# Altium PCB ScaledModelBoard.PcbDoc
Units mm, origin at the board's own origin, x right, y up, seen from the top; angles counter-clockwise.
Board outline 100 x 100 mm, 2 copper layers (Top Layer, Bottom Layer); 23 components, 27 nets, 101 pads, 7 vias.
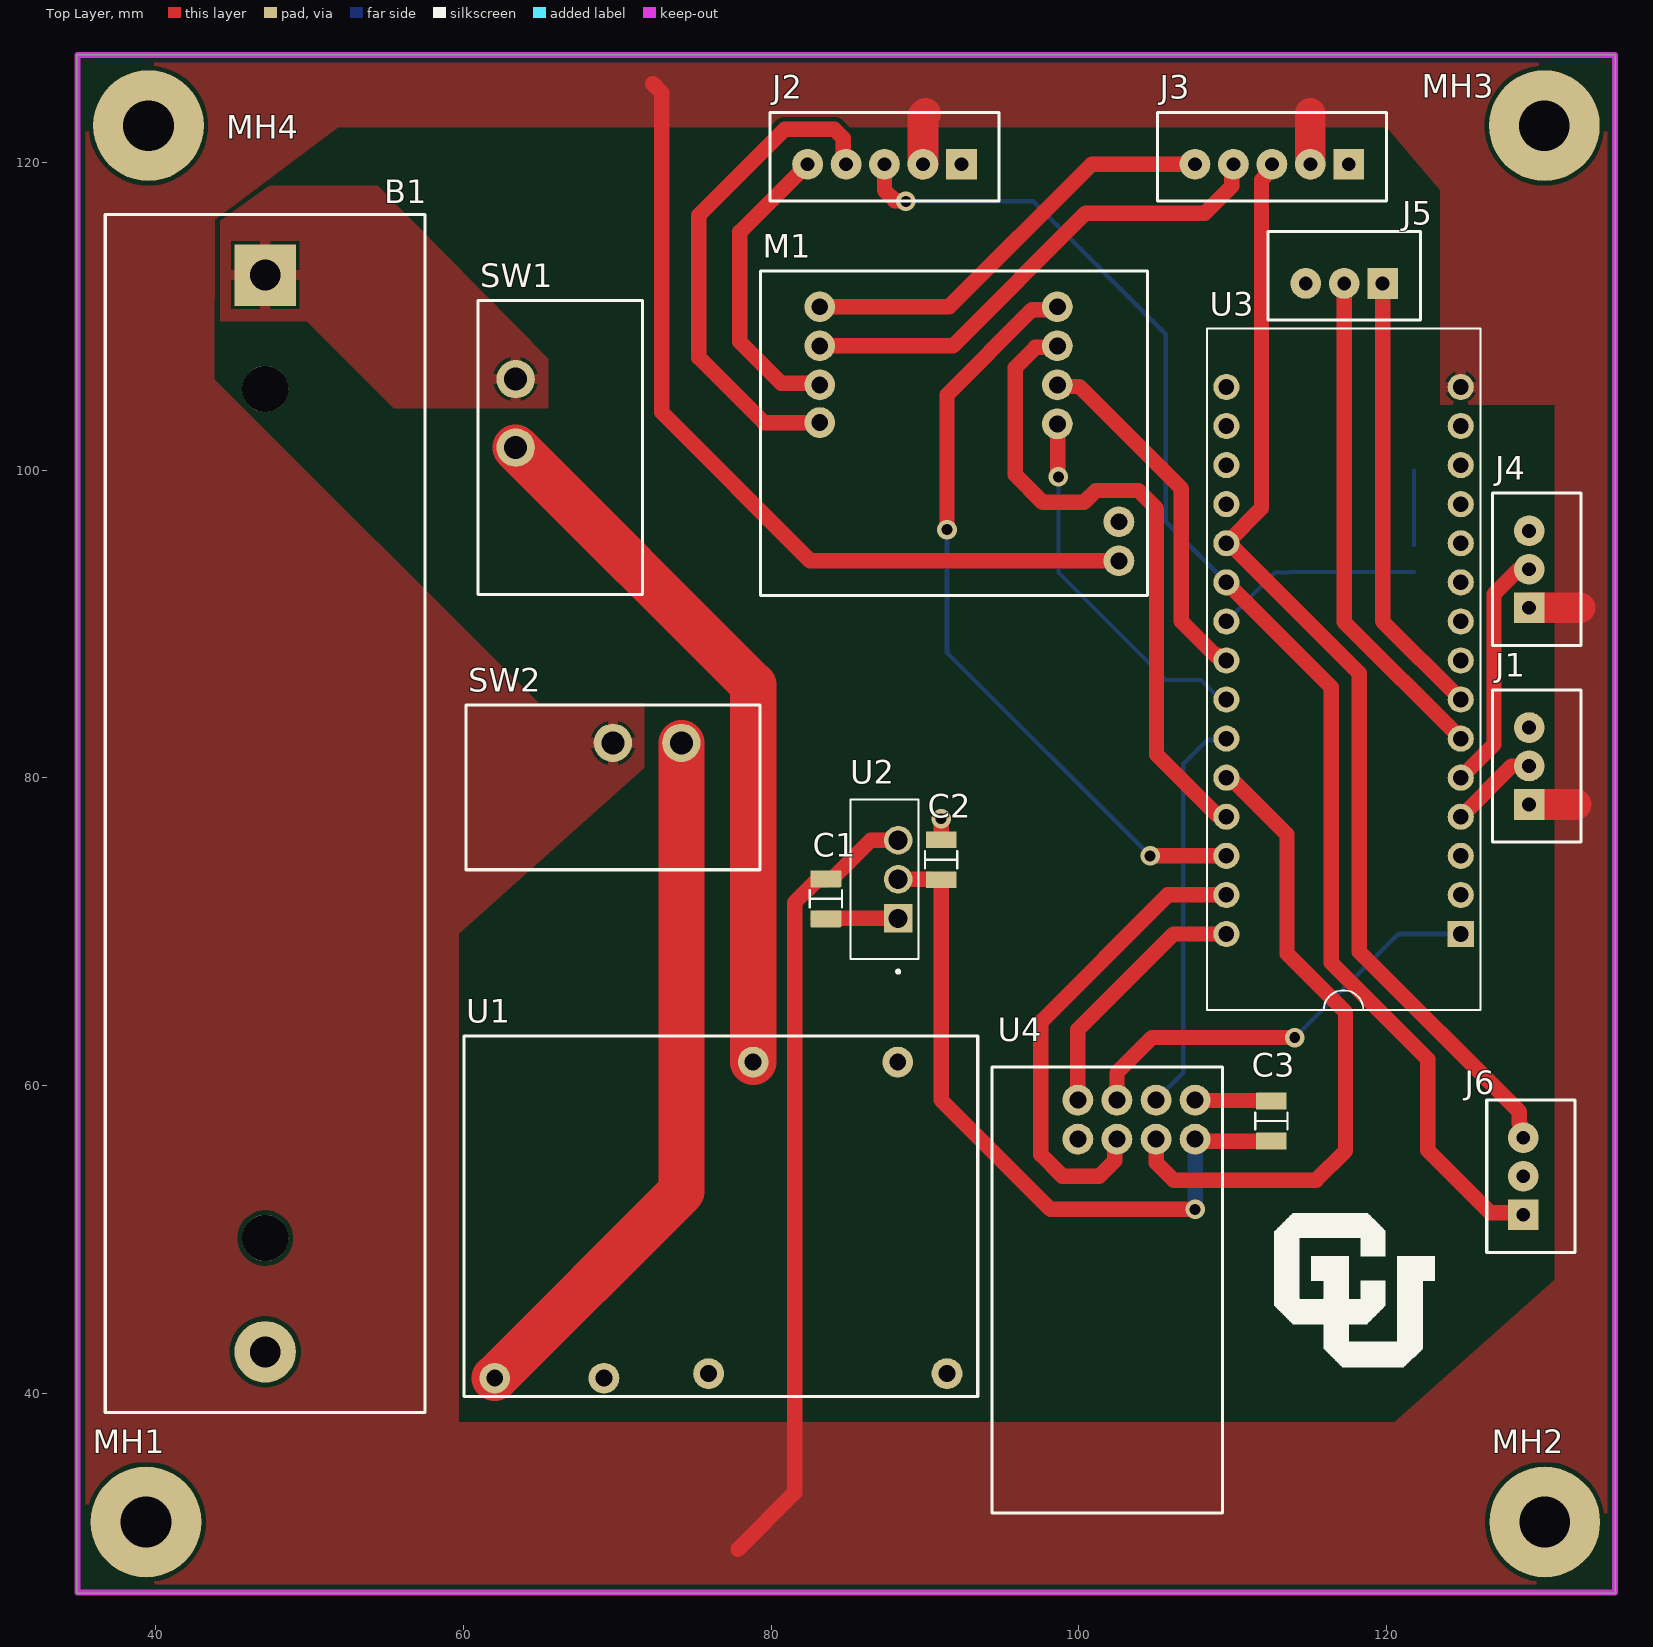
[diagram p0: Top Layer view]
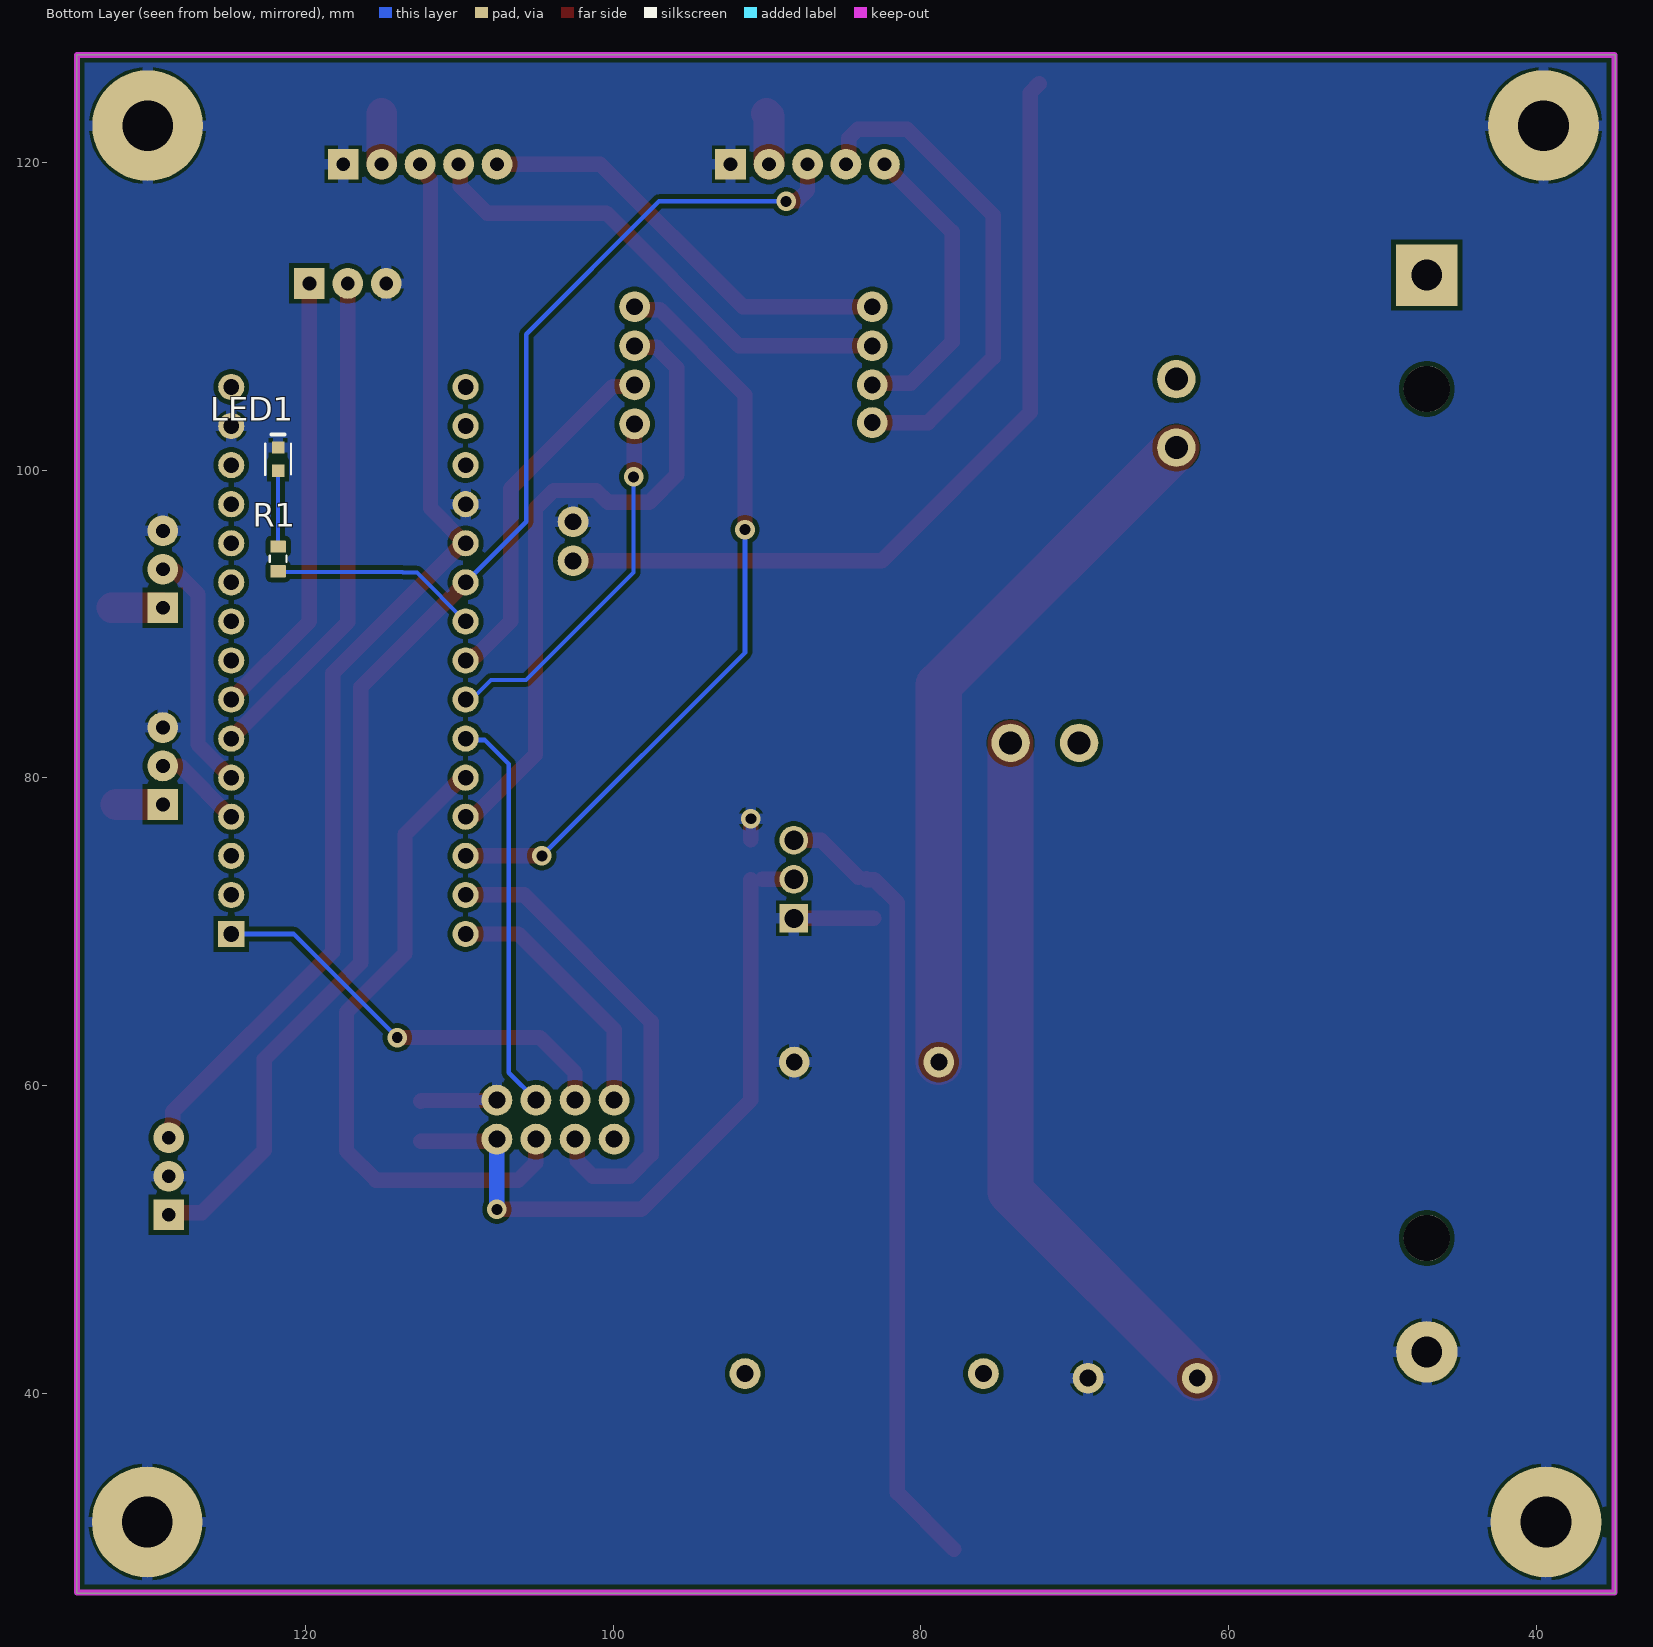
[diagram p1: Bottom Layer view, seen from below]
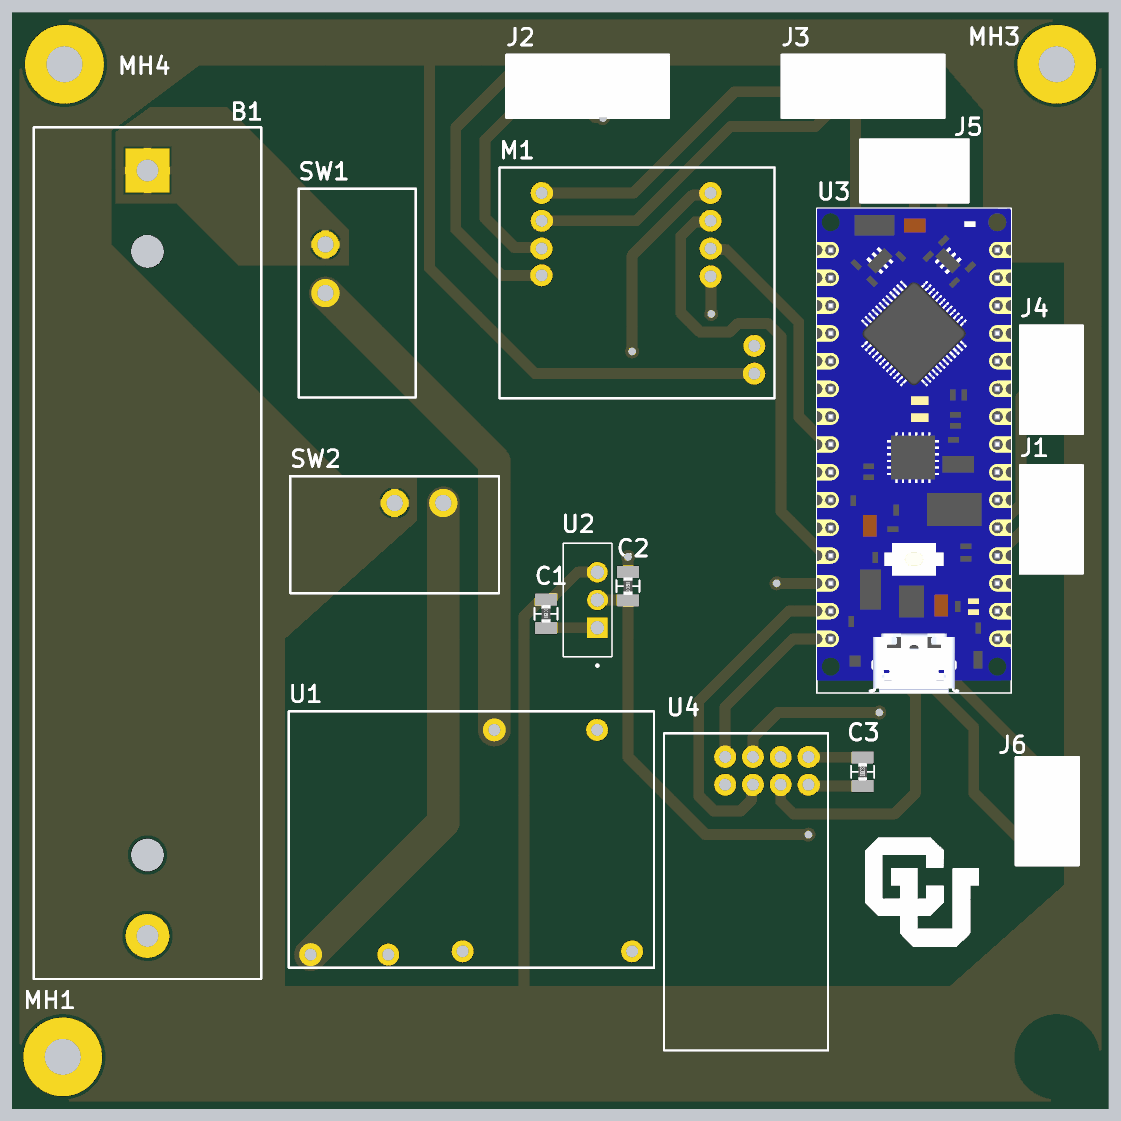
[diagram p2: 3D render of the assembled board from above, using the file's embedded part models]

## Layer stack, top to bottom
Top Solder: solder mask 0.0102, Solder Resist, Dk 3.5
Top Layer: signal copper 0.0356
Dielectric 1: dielectric 0.32, FR-4, Dk 4.8
Bottom Layer: signal copper 0.0356
Bottom Solder: solder mask 0.0102, Solder Resist, Dk 3.5

## Board outline
34.874,27 34.874,127 134.874,127 134.874,27

## Design rules (kind name [scope] priority, off if disabled: settings)
Clearance [All] p1: gap=0.3 ignorepadtopadclearanceinfootprint=FALSE
HoleSize [All] p1: absolutevalues=TRUE maxlimit=5 minlimit=0.025 maxpercent=80.000 minpercent=20.000
MinimumSolderMaskSliver [All] p1: minsoldermaskwidth=0.1
PolygonConnect [All] p1: connectstyle=Relief reliefconductorwidth=0.7 reliefentries=4 polygonreliefangle="90 Angle" airgapwidth=0.2
RoutingVias [All] p1: holewidth=0.711 width=1.27 viastyle="Through Hole" minholewidth=0.711 minwidth=1.27 maxholewidth=0.711 maxwidth=1.27
SilkToSilkClearance [All] p1: silktosilkclearance=0.15
SilkToSolderMaskClearance [IsPad] p1: minsilkscreentomaskgap=0.15 clearancetoexposedcopper=TRUE
SolderMaskExpansion [All] p1: expansion=0.04 istentingtop=FALSE
SupplyNets "Schematic Supply Nets_2" [InNet('+3.7')] p1: voltage=0.000
SupplyNets "Schematic Supply Nets" [InNet('+5')] p2: voltage=0.000
SupplyNets "Schematic Supply Nets_3" [InNet('GND')] p3: voltage=0.000
SupplyNets "Schematic Supply Nets_1" [InNet('+3.3')] p4: voltage=0.000
Width [All] p1: maxlimit=3 minlimit=0.2 preferedwidth=0.3 bottomlayer_minwidth=0.254 bottomlayer_prefwidth=0.254 minimp=50.000000 maximp=50.000000 favimp=50.000000
26 further rules are at their usual default settings.

## Components (designator, comment, footprint, x,y, rotation, side; value= is the part's Value field where it differs from the comment)
B1 "18650_Battery_Holder" 18650 47.117,77.683 r90 top
C1 "10uF" "CAP 1206" 83.566,72.136 r90 top
C2 "22uF" "CAP 1206" 91.059,74.676 r270 top
C3 "100uF" "CAP 1206" 112.522,57.688 r90 top
J1 "Light_Sensor_XH_3pin" "JST XH B3B-XH-A" 129.286,80.772 r90 top
J2 "Motor_XH_5pin" "JST XH B5B-XH-A" 87.376,119.888 r180 top
J3 "Motor_XH_5pin" "JST XH B5B-XH-A" 112.562,119.888 r180 top
J4 "Light_Sensor_XH_3pin" "JST XH B3B-XH-A" 129.286,93.559 r90 top
J5 "Braking_XH_3Pin" "JST XH B3B-XH-A" 117.261,112.141 r180 top
J6 "Speed_Sensor_XH_3pin" "JST XH B3B-XH-A" 128.905,54.102 r90 top
LED1 "0603Gr" LED_0603 121.793,100.723 r90 bottom value=Green
M1 "Motor_Driver" Driver 91.891,102.407 r180 top
MH1 "=VALUE" SCREW_M3.0#1 39.37,30.607 r0 top
MH2 "=VALUE" SCREW_M3.0#2 142.161,32.766 r0 top
MH3 "=VALUE" SCREW_M3.0#3 130.274,122.4 r0 top
MH4 "=VALUE" SCREW_M3.0#4 39.398,122.4 r0 top
R1 "100Ohm" "RES 0603" 121.793,94.234 r270 bottom
SW1 "Switch" Switch 66.294,101.473 r90 top
SW2 "Switch" Switch 69.723,79.375 r0 top
U1 "Battery_StepUp" DC/DC 76.74,51.5 r180 top
U2 "Linear_Stabilizer" TO-220 87.376,73.406 r90 top
U3 "Arduino_NANO" MODULE_ABX00028 117.221,87.63 r90 top
U4 "NRF_24l01" NRF24L01 103.759,57.785 r270 top

## Footprints (in the part's own frame and the unit in brackets; to place one, negate y for a bottom-side part, rotate by r counter-clockwise, add the part's x,y. Pads: shape width x height; smd on the part's side, far side on the other; paste and mask are expansions set on the pad)
18650 [mm]
  rect 4x4 hole 2: 1(35,0)
  round 4 hole 2: 2(-35,0)
  round 3 hole 3 unplated: ""(-27.6,0) ""(27.6,0)
  silkscreen extent -38.95,-10.4 38.95,10.4
"CAP 1206" [mm] "Chip Resistor, 2-Leads, Body 1.60x0.80mm"
  rrect10% 1.1x2 smd: 1(-1.3,0) 2(1.3,0)
  silkscreen extent -0.55,-1.05 0.55,1.05, body extent -0.8,-0.4 0.8,0.4, height 0.45
DC/DC [mm]
  round 2 hole 1.1: 1(-14.7,10.225) 2(-11.5,-10.025) 3(-2.1,-10.025) 4(14.7,10.525) 5(7.6,10.525) 6(0.8,10.225)
  silkscreen extent -16.7,-11.72 16.7,11.73
Driver [mm]
  round 2 hole 1.1: 1(-10.725,8.3) 2(-10.725,5.76) 3(-6.725,-0.6) 4(-6.725,-3.14) 5(-6.725,-5.68) 6(-6.725,-8.22) 7(8.725,-8.22) 8(8.725,-5.68) 9(8.725,-3.14) 10(8.725,-0.69)
  silkscreen extent -12.57,-10.55 12.58,10.55
"JST XH B3B-XH-A" [mm]
  rect 2x2 hole 0.9: 1(-2.5,0)
  round 2 hole 0.9: 2(0,0) 3(2.5,0)
  silkscreen extent -4.95,-3.38 4.95,2.38, body extent -4.95,-3.38 4.95,2.38, height 7
"JST XH B5B-XH-A" [mm]
  rect 2x2 hole 0.9: 1(-5,0)
  round 2 hole 0.9: 2(-2.5,0) 3(0,0) 4(2.5,0) 5(5,0)
  silkscreen extent -7.45,-3.38 7.45,2.38, body extent -7.45,-3.38 7.45,2.38, height 7
LED_0603 [mm]
  rect 0.8x0.8 smd: 1(-0.75,0) 2(0.75,0)
  silkscreen extent -1.02,-0.84 1.6,0.84, body extent -0.84,-0.41 0.76,0.39, height 0.55
MODULE_ABX00028 [mm]
  rect 1.7x1.7 / inner round 1.7 / far side rect 1.7x1.7 hole 1.016: 1(-17.78,-7.62)
  round 1.7 hole 1.016: 2(-15.24,-7.62) 3(-12.7,-7.62) 4(-10.16,-7.62) 5(-7.62,-7.62) 6(-5.08,-7.62) 7(-2.54,-7.62) 8(0,-7.62) 9(2.54,-7.62) 10(5.08,-7.62) 11(7.62,-7.62) 12(10.16,-7.62) 13(12.7,-7.62) 14(15.24,-7.62) 15(17.78,-7.62) 16(17.78,7.62) 17(15.24,7.62) 18(12.7,7.62) 19(10.16,7.62) 20(7.62,7.62) 21(5.08,7.62) 22(2.54,7.62) 23(0,7.62) 24(-2.54,7.62) 25(-5.08,7.62) 26(-7.62,7.62) 27(-10.16,7.62) 28(-12.7,7.62) 29(-15.24,7.62) 30(-17.78,7.62)
  silkscreen extent -22.73,-8.89 21.59,8.89, body extent -22.74,-8.89 21.59,8.89, height 6
NRF24L01 [mm]
  round 2 hole 1.1: 1(1.27,-3.81) 2(1.27,-1.27) 3(1.27,1.27) 4(1.27,3.81) 5(-1.27,3.81) 6(-1.27,1.27) 7(-1.27,-1.27) 8(-1.27,-3.81)
  silkscreen extent -3.43,-9.4 25.57,5.6
"RES 0603" [mm] "Chip Resistor, 2-Leads, Body 1.60x0.80mm"
  rrect10% 0.8x1 smd: 1(-0.8,0) 2(0.8,0)
  silkscreen extent -0.2,-0.55 0.2,0.55, body extent -0.8,-0.4 0.8,0.4, height 0.45
SCREW_M3.0#1 [mm] "M3 Screw Close FIt"
  round 7.2 hole 3.301: 1(0,1.016)
SCREW_M3.0#2 [mm] "M3 Screw Close FIt"
  round 7.2 hole 3.301: 1(-11.859,-1.143)
SCREW_M3.0#3 [mm] "M3 Screw Close FIt"
  round 7.2 hole 3.301: 1(0,0)
SCREW_M3.0#4 [mm] "M3 Screw Close FIt"
  round 7.2 hole 3.301: 1(0.127,0)
Switch [mm]
  round 2.5 hole 1.5: 1(0,2.9) 2(4.45,2.9)
  silkscreen extent -9.55,-5.35 9.55,5.35
TO-220 [mil] "TO254P1035X444X2115-3N)"
  rect 73.5x73.5 / inner round 73.5 / far side rect 73.5x73.5 hole 49: 1(-100,-35)
  round 73.5 hole 49: 2(0,-35) 3(100,-35)
  silkscreen extent -240,-88 204,88

## Part data
C1 C2 C3: library part Capacitor, "SMT Capacitor"
LED1: library part LED_GREEN_0603, "LIGHT EMITTING DIODES (LED) GREEN 520~535NM 112~258MCD@20MA TOP VIEW 0603 ROHS", LCSC Part#=C72043, MFR Part #=19-217/GHC-YR1S2/3T, Type=Basic
MH1 MH2 MH3 MH4: library part SCREW
R1: library part R_100Ohm_1206, "100Ω ±1% 0.25W ±100ppm/℃ 1206 Chip Resistor - Surface Mount RoHS", LCSC Part#=C17901, MFR Part #=1206W4F1000T5E, Datasheet=https://datasheet.lcsc.com/lcsc/2206010145_UNI-ROYAL-Uniroyal-Elec-1206W4F1000T5E_C17901.pdf, Type=Basic

## Via types
v1: diameter 1.27, hole 0.711, Top Layer to Bottom Layer, tented both sides, 7 vias

## Nets (pads, with @x,y where several pads share a name; then routed paths per layer and width w, separated by ;. In a path a pad name is that pad's centre, name@x,y a point inside that pad or via, vN(x,y) a via of type N, cw(c..) or ccw(c..) an arc to the next point about the centre after c; other vN are vias at no path point)
3.7V_Out_SW: B1.1 SW1.2
5V_Out_SW: SW2.2 U1.4 | length 46.3
  Top Layer w3: U1.4 74.173,53.108 SW2.2
+3.3: C2.2 C3.1 U2.2 U4.4 | length 45.4
  Top Layer w1: U2.2 C2.2@90.325,73.406 ; C2.2 91.059,59.055 91.352,58.762 98.171,51.943 v1(107.569,51.943) ; U4.4 107.696,56.388 C3.1
  Bottom Layer w1: v1(107.569,51.943) U4.4
+3.7: SW1.1 U1.3 | length 46.3
  Top Layer w3: SW1.1 78.84,86.027 U1.3
+5: C1.2 J1.1 J2.2 J3.2 J4.1 M1.1 SW2.1 U2.3 U3.15 | length 119.8
  Top Layer w1: 72.312,125.124 72.898,124.538 72.898,103.759 82.55,94.107 M1.1 ; 77.851,29.845 81.534,33.528 81.534,71.882 83.038,73.386 83.516,73.386 C1.2 ; C1.2@84.066,73.525 86.487,75.946 U2.3
  Top Layer w2: J2.2 89.876,123.023 90.043,123.19 ; J3.2 115.062,123.19 ; J1.1 132.328,78.272 ; J4.1 132.588,91.059
Brake1: J5.1 U3.7 | length 29.2
  Top Layer w1: J5.1 119.761,90.17 U3.7
Brake2: J5.2 U3.6 | length 32.7
  Top Layer w1: J5.2 117.261,90.13 U3.6
CE: U3.25 U4.6 | length 26.4
  Top Layer w1: U3.25 U3.25@109.728,82.677
  Bottom Layer w0.3: U4.6@105.029,59.061 106.807,60.839 106.807,80.899 108.368,82.46 U3.25@109.511,82.46
  Bottom Layer w1: U4.6 U4.6@105.029,59.061 ; U3.25@109.511,82.46 U3.25@109.728,82.677
CNS: U3.26 U4.3 | length 42.7
  Top Layer w1: U4.3 105.035,56.509 105.035,54.985 106.172,53.848 109.474,53.848 115.443,53.848 117.348,55.753 117.348,64.77 113.541,68.577 113.541,76.324 110.205,79.66 110.14,79.66 109.79,80.01 U3.26
GND: B1.2 C1.1 C2.1 C3.2 J1.3 J2.1 J3.1 J4.3 J5.3 J6.2 LED1.2 M1.2 MH1.1 MH2.1 MH3.1 MH4.1 U1.2 U1.5 U2.1 U3.14 U3.19 U4.5 | length 11.6
  Top Layer w1: C1.1@83.058,70.866 U2.1 ; C2.1 v1(91.059,77.343) ; U4.5 107.603,59.021 112.488,59.021 C3.2
LightSGNL1: J1.2 U3.4 | length 5.8
  Top Layer w1: U3.4 128.143,80.772 J1.2
LightSGNL2: J4.2 U3.5 | length 15
  Top Layer w1: U3.5 127,82.169 127,91.948 J4.2@128.524,93.472
MISO: U3.30 U4.8 | length 16.8
  Top Layer w1: U4.8 99.949,63.627 106.172,69.85 U3.30
MOSI: U3.29 U4.2 | length 31.4
  Top Layer w1: U4.2 102.356,56.382 102.356,55.112 101.346,54.102 98.933,54.102 97.536,55.499 97.536,64.135 105.791,72.39 U3.29
MotrAD9: M1.5 U3.27 | length 43.2
  Top Layer w1: M1.5 98.51,107.981 97.186,107.981 95.885,106.68 95.885,99.695 97.663,97.917 100.35,97.917 101.112,98.679 103.886,98.679 105.059,97.506 105.059,81.504 108.959,77.604 109.467,77.604 U3.27
MotrAD10: M1.6 U3.28 | length 49.9
  Top Layer w1: v1(91.44,96.139) 91.44,104.902 96.974,110.436 98.425,110.436 M1.6 ; v1(104.648,74.93) U3.28
  Bottom Layer w0.3: v1@91.442,96.137 91.442,88.136 v1(104.648,74.93)
  Bottom Layer w1: v1(91.44,96.139) v1@91.442,96.137
MotrBD5: M1.4 U3.23 | length 23.5
  Top Layer w1: M1.4 98.722,105.441 100.045,105.441 106.68,98.806 106.68,90.17 108.87,87.98 109.062,87.98 109.412,87.63 U3.23
MotrBD6: M1.3 U3.24 | length 23.9
  Top Layer w1: v1(98.679,99.568) 98.647,99.6 98.647,102.976 M1.3 M1.3@98.802,103.007 ; U3.24@109.676,85.165 U3.24 U3.24@109.728,85.09
  Bottom Layer w0.254: v1(98.679,99.568) 98.679,93.345 105.671,86.353 107.957,86.353 U3.24@109.093,85.217
NetJ2_4: J2.4 M1.10 | length 32.6
  Top Layer w1: M1.10 79.529,103.097 75.311,107.315 75.311,116.586 80.899,122.174 84.099,122.174 84.685,121.588 84.685,120.079 J2.4
NetJ2_5: J2.5 M1.9 | length 19.7
  Top Layer w1: J2.5 77.978,115.49 77.978,108.331 80.666,105.643 83.07,105.643 M1.9
NetJ3_4: J3.4 M1.8 | length 32.6
  Top Layer w1: M1.8 91.831,108.087 100.457,116.713 108.204,116.713 109.953,118.462 109.953,119.779 J3.4
NetJ3_5: J3.5 M1.7 | length 28.2
  Top Layer w1: M1.7 91.577,110.627 100.838,119.888 J3.5
NetLED1_1: LED1.1 R1.1 | length 4.9
  Bottom Layer w0.254: R1.1@121.793,95.123 LED1.1
NetR1_2: R1.2 U3.22 | length 13.5
  Bottom Layer w0.254: U3.22 112.776,93.345 113.665,93.345 113.69,93.37 R1.2@121.793,93.37
SCK: U3.1 U4.7 | length 27.9
  Top Layer w1: U4.7 102.489,60.833 104.775,63.119 v1(114.046,63.119)
  Bottom Layer w0.3: v1(114.046,63.119) 120.777,69.85 U3.1
Speed1: J2.3 J6.1 U3.21 | length 91.8
  Top Layer w1: J2.3 87.376,118.196 88.045,117.527 88.721,117.527 v1(88.773,117.475) ; U3.21@109.412,92.71 U3.21 116.428,85.883 116.428,67.976 122.682,61.722 122.682,55.793 126.737,51.738 128.515,51.738 J6.1@128.651,51.602
  Bottom Layer w0.3: v1(88.773,117.475) 97.028,117.475 105.664,108.839 105.664,96.647 U3.21
Speed2: J3.3 J6.3 U3.20 | length 71.7
  Top Layer w1: U3.20@109.601,95.439 U3.20 U3.20@109.696,95.345 ; J3.3@112.062,119.047 111.887,118.872 111.887,97.536 U3.20@109.696,95.345 ; J6.3@128.651,56.602 128.714,56.665 128.714,57.5 128.651,57.563 128.651,58.293 118.237,68.707 118.237,86.803 U3.20@109.696,95.345
pads on no net: B1. U1.1 U1.6 U3.2 U3.3 U3.8 U3.9 U3.10 U3.11 U3.12 U3.13 U3.16 U3.17 U3.18 U4.1

## Polygon pours and split planes (outlines as drawn)
+5 on Top Layer "+5_L01_P010" (solid, remove dead copper, pour order 10): 34.885,127.381 34.874,27 65.913,26.686 65.913,38.1 59.69,38.1 59.69,69.854 71.755,80.645 71.755,84.836 64.897,84.836 43.815,105.918 43.822,116.278 58.641,127.381
+5 on Top Layer "+5_L01_P004" (solid, remove dead copper, pour order 4): 119.888,27.686 143.21,27.686 143.046,127.929 130.937,127.929 130.937,47.362 119.888,37.558
+5 on Top Layer "+5_L01_P008" (solid, pour order 8): 133.604,104.267 123.507,104.267 123.507,117.731 123.507,123.634 133.604,123.634
+5 on Top Layer "+5_L01_P007" (solid, remove dead copper, pour order 7): 132.842,117.602 132.842,127.762 33.909,127.762 33.909,122.301 88.796,122.301 120.015,122.301 123.698,117.983
+5 on Top Layer "+5_L01_P005" (solid, remove dead copper, pour order 5): 65.89,38.1 133.019,38.1 136.125,19.516 65.35,20.087
3.7V_Out_SW on Top Layer "3.7V_OUT_SW_L01_P002" (solid, pour order 2): 44.196,116.205 47.371,118.491 54.422,118.491 65.532,107.235 65.532,104.013 55.464,104.013 49.807,109.67 44.196,109.67
GND on Bottom Layer "GND_L02_P001" (solid, remove dead copper, pour order 1): 26.684,128 26.811,128.254 154.573,128.254 154.573,25.765 154.319,26.019 27.065,26.019

## Keep-outs
Keep-Out Layer:
  lines w0.4: 34.925,27.051 134.873,27.051 134.873,127 34.925,127 34.925,27.051

## Silkscreen, mask and mechanical layers (free items; w line width, h text height)
Top Overlay:
  region: 344 vertices and 0 holes, not listed, extent 112.727,41.689 123.157,51.705
BoardOutlin:
  the board outline again, w0.254